# Altium PCB CCjammerRev1.PcbDoc
Units mil, origin at the board's own origin, x right, y up, seen from the top; angles counter-clockwise.
Board outline 3170.31 x 1920.16 mil, 2 copper layers (Top Layer, Bottom Layer); 10 components, 6 nets, 26 pads, 2 vias.
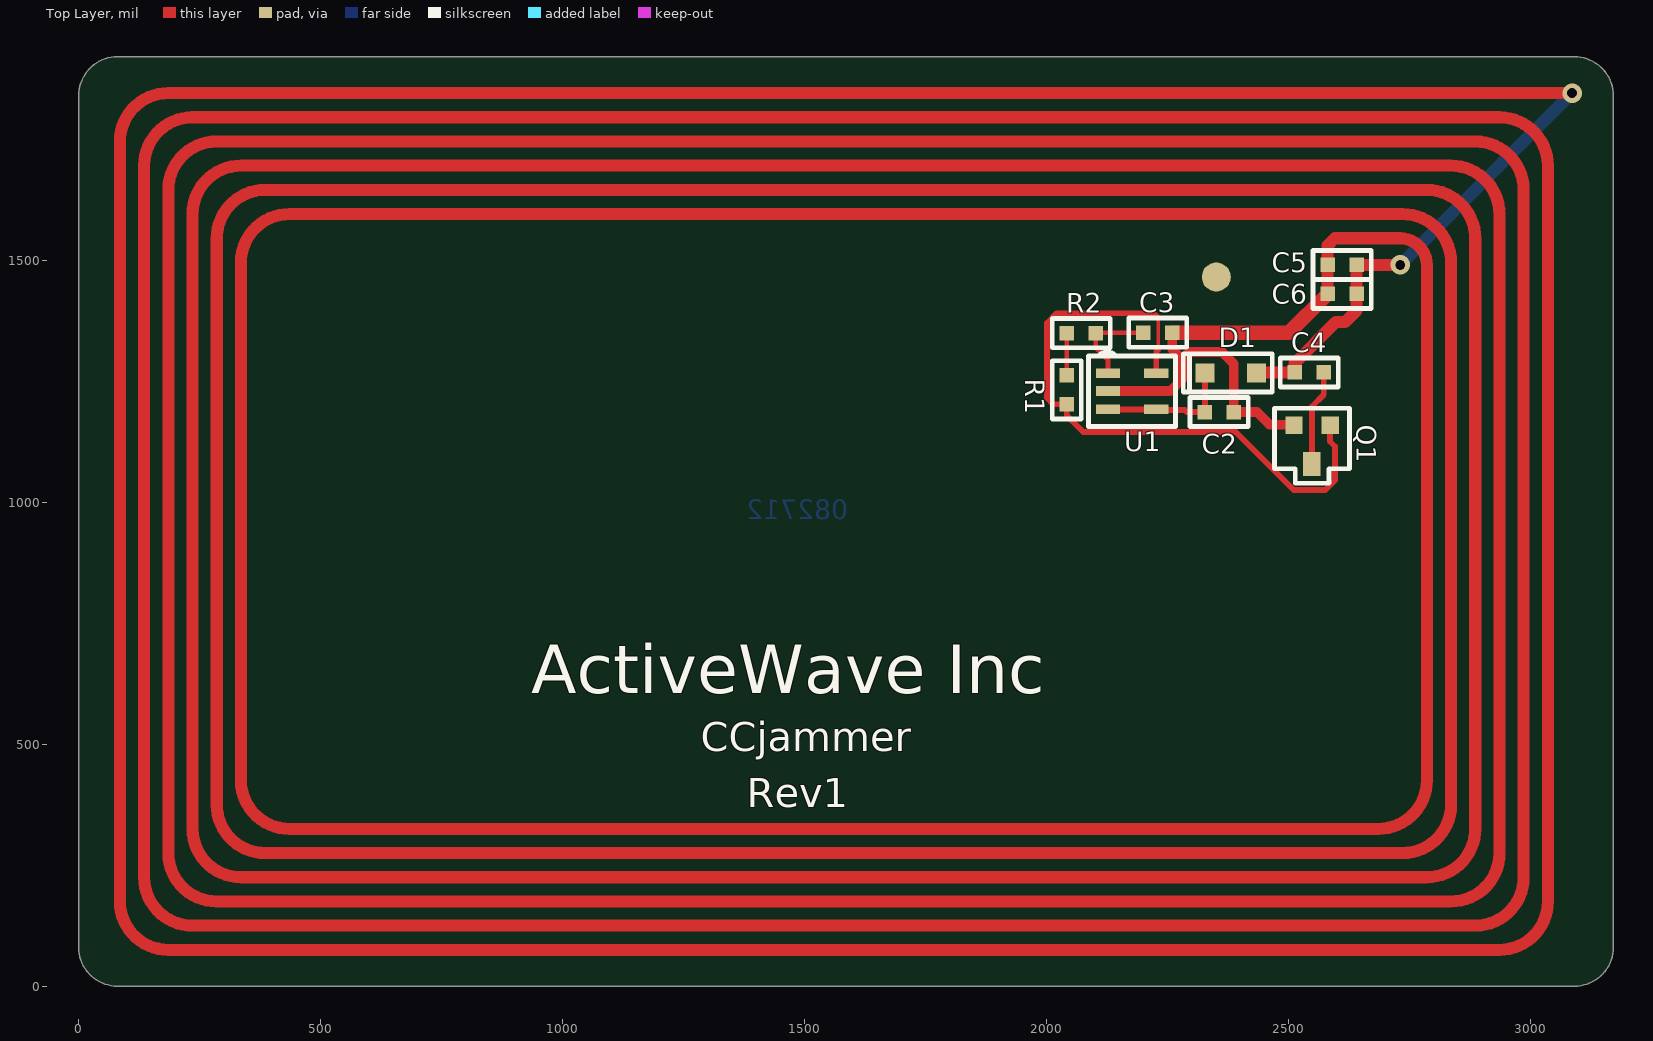
[diagram p0: Top Layer view]
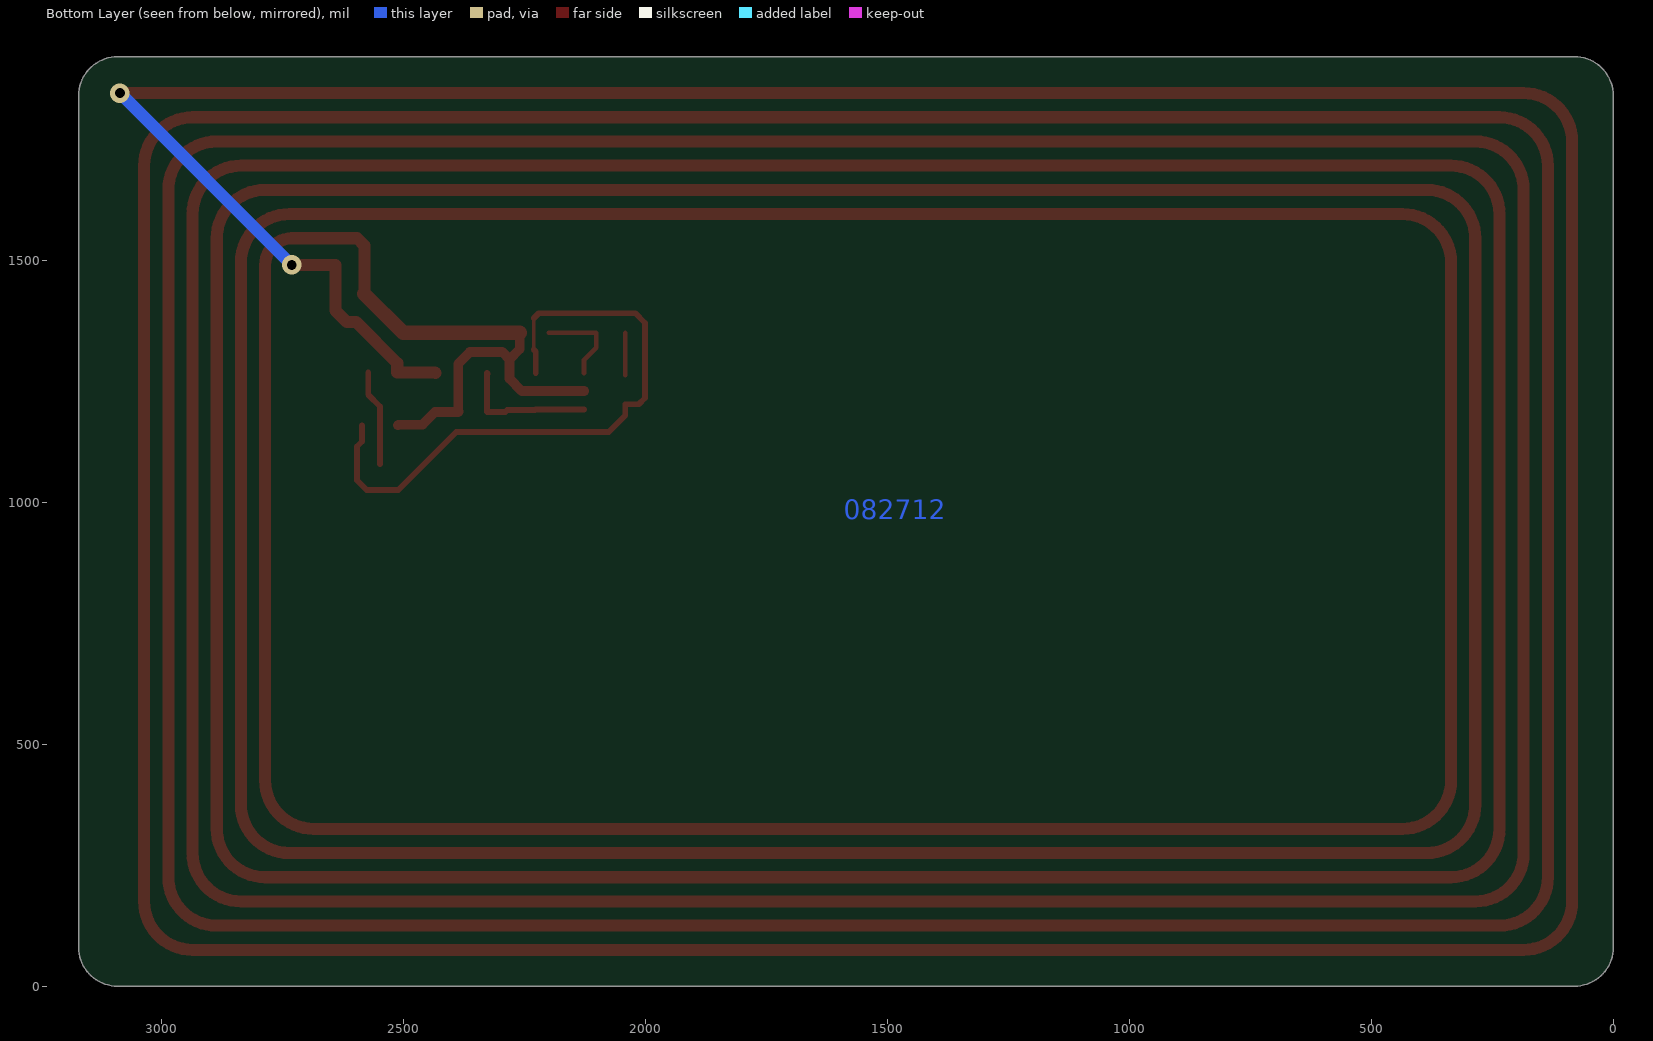
[diagram p1: Bottom Layer view, seen from below]

## Layer stack, top to bottom
Top Layer: signal copper 1.4
Dielectric: core 12.6, FR-4, Dk 4.8
Bottom Layer: signal copper 1.4

## Board outline
-0.16,80.16 ccw(c80,80.16) 80,0 3090,0 ccw(c3090,80.16) 3170.16,80.16 3170,80.16 3170,1839.84 3170.16,1839.84 ccw(c3090,1839.84) 3090,1920 80.16,1920 80.16,1920.16 ccw(c80.16,1840) 0,1840

## Design rules (kind name [scope] priority, off if disabled: settings)
Clearance [All] p1: gap=10
PolygonConnect [All] p1: connectstyle=Relief reliefconductorwidth=10 reliefentries=4 polygonreliefangle="90 Angle"
RoutingVias [All] p1: holewidth=28 width=50 viastyle="Through Hole" minholewidth=28 minwidth=50 maxholewidth=28 maxwidth=50
SilkToSilkClearance [All] p1 off: silktosilkclearance=2
SilkscreenOverComponentPads [All] p1 off: minsilkscreentomaskgap=5
SolderMaskExpansion [All] p1: expansion=4
TestPointUsage FabricationTestPointUsage [All] p1: valid=0 allowmultiple=FALSE
Testpoint FabricationTestpoint [All] p1: side=3 testpointundercomponent=TRUE minsize=40 maxsize=100 preferedsize=60 minholesize=0 maxholesize=40 preferedholesize=32 testpointgrid=1 style=297 order=0123456789
Width [All] p1: maxlimit=100 minlimit=6 preferedwidth=10
22 further rules are at their usual default settings.

## Components (designator, comment, footprint, x,y, rotation, side; value= is the part's Value field where it differs from the comment)
C2 "0.1uf" 0603_072205 2356,1186 r180 top
C3 "0.1uf" 0603_072205 2229,1350 r180 top
C4 "10pf" 0603_072205 2542,1268 r180 top
C5 "10pf" 0603_072205 2610,1490 r0 top
C6 "10pf" 0603_072205 2610,1430 r0 top
D1 "DIODE" SOD323_072005 2380,1267 r0 top
Q1 "VN0605" "SOT23 FET_012005" 2548,1119 r180 top
R1 "1K" 0603_072205 2041,1232 r270 top
R2 "2K" 0603_072205 2071,1349 r180 top
U1 "MIC1557" SOT25_030205 2176,1229 r180 top

## Footprints (in the part's own frame and the unit in brackets; to place one, negate y for a bottom-side part, rotate by r counter-clockwise, add the part's x,y. Pads: shape width x height; smd on the part's side, far side on the other; paste and mask are expansions set on the pad)
0603_072205 [mil] "SM"
  rect 30x30 smd: 1(-30,0) 2(30,0)
  silkscreen extent -60,-30 60,30
SOD323_072005 [mm] "SMT"
  rect 1x1 smd: A(1.35,0) K(-1.35,0)
  silkscreen extent -2.5,-1 2.17,1
"SOT23 FET_012005" [mil] "SMT"
  rect 36x50 smd: D(0.5,40)
  rect 36x36 smd: G(-37.5,-40) S(37.5,-40)
  silkscreen extent -78,-75 78,80
SOT25_030205 [mil] "SMT"
  rect 50x20 smd mask+3: 1(50,-37.5) 2(50,-0.5) 3(50,37.5) 4(-50,37.5) 5(-50,-37.5)
  round 30 on Mech1 paste+0 mask+3: 1(65,-75)
  silkscreen extent -90,-81 90,73

## Part data
C2 C3 C4 C5 C6: library part Cap, "Capacitor"
D1: library part DIODE_DUAL_COM_AN_SOT23
Q1: library part "FET N CHANNEL"
R1 R2: library part RESISTOR
U1: library part MIC1555

## Free pads (board coordinates)
  round 60 smd: 0(2350,1465)

## Via types
v1: diameter 40, hole 20, Top Layer to Bottom Layer, tented both sides, 2 vias

## Nets (pads, with @x,y where several pads share a name; then routed paths per layer and width w, separated by ;. In a path a pad name is that pad's centre, name@x,y a point inside that pad or via, vN(x,y) a via of type N, cw(c..) or ccw(c..) an arc to the next point about the centre after c; other vN are vias at no path point)
ANTENNA: C2.1 C3.1 C4.2 C5.1 C5.2 C6.1 C6.2 D1.A Q1.S U1.2 | length 51881.3
  Top Layer w10: 2254.5,1229.5 2255,1230
  Top Layer w20: U1.2 2254.5,1229.5 ; 2255,1230 2280,1255 2280,1295 ; C3.1 2259,1316 2280,1295 ; C2.1@2385,1187 C2.1 ; Q1.S 2509.5,1160 2460,1160 2434,1186 C2.1 ; C4.2@2510.5,1266.5 C4.2 ; 2280,1295 2295,1310 2362,1310 2386,1286 C2.1
  Top Layer w25: D1.A 2434.15,1268 C4.2 2512,1287 2597.34,1372.34 2615.19,1372.34 ; C6.1 C5.1 2580,1530 2595,1545 2730,1545 cw(c2730,1490) 2785,1490 2785,425 cw(c2685,425) 2685,325 435,325 cw(c435,425) 335,425 335,1495 cw(c435,1495) 435,1595 625,1595 2560,1595 2735,1595 cw(c2735,1495) 2835,1495 2835,375 cw(c2735,375) 2735,275 385,275 cw(c385,375) 285,375 285,1545 cw(c385,1545) 385,1645 2785,1645 cw(c2785,1545) 2885,1545 2885,325 cw(c2785,325) 2785,225 335,225 cw(c335,325) 235,325 235,1595 cw(c335,1595) 335,1695 2835,1695 cw(c2835,1595) 2935,1595 2935,275 cw(c2835,275) 2835,175 285,175 cw(c285,275) 185,275 185,1645 cw(c285,1645) 285,1745 2885,1745 cw(c2885,1645) 2985,1645 2985,225 cw(c2885,225) 2885,125 235,125 cw(c235,225) 135,225 135,1695 cw(c235,1695) 235,1795 2935,1795 cw(c2935,1695) 3035,1695 3035,175 cw(c2935,175) 2935,75 185,75 cw(c185,175) 85,175 85,1745 cw(c185,1745) 185,1845 v1(3085,1845) ; 2615.77,1371.77 2640,1396 C6.2 C5.2 v1(2730,1490)
  Top Layer w30: C3.1 2500,1350 C6.1
  Bottom Layer w25: v1(2730,1490) v1(3085,1845)
GATEDRV: Q1.G R1.2 U1.5 | length 1325.7
  Top Layer w8: 2230,1315 2230,1380
  Top Layer w12: U1.5 2226,1311 2230,1315 ; 2230,1380 2220,1390 2020,1390 2000,1370 2000,1215 2013,1202 R1.2 2041,1179 2075,1145 2390,1145 2510,1025 2575,1025 2595,1045 2595,1115 2585,1125 Q1.G@2585,1158.5
NetC3_2: C3.2 R2.1 U1.1@2126,1266.5 | length 191.3
  Top Layer w10: U1.1@2126,1266.5 2126,1294 2101,1319 R2.1 2102,1350 C3.2
NetC4_1: C4.1 Q1.D | length 199.1
  Top Layer w12: Q1.D 2547.5,1197.5 2572,1222 C4.1
NetR1_1: R1.1 R2.2 | length 87
  Top Layer w10: R1.1 R2.2
VCC: C2.2 D1.K U1.3 U1.4 | length 286.2
  Top Layer w12: U1.3 U1.4 2227.5,1190 2285,1190 2289,1186 C2.2 2326.85,1186.85 D1.K D1.K@2325,1265.15
pads on no net: U1.1@2111,1304

## Other copper
Top Layer:
  text ".Layer_Name" at 1733,-1589 h80
Bottom Layer:
  text "082712" at 1590,965 h40
  text ".Layer_Name" at 2374,-1585 h80

## Silkscreen, mask and mechanical layers (free items; w line width, h text height)
Top Overlay:
  text "ActiveWave Inc" at 935,605 h100
  text "CCjammer" at 1285,485 h60
  text "Rev1" at 1380,370 h60
  text ".Layer_Name" at 1716,-1594 h80
Top Paste:
  text ".Layer_Name" at 1724,-1592 h80
Top Solder:
  text ".Layer_Name" at 1727,-1592 h80
Bottom Solder:
  text ".Layer_Name" at 1720,-1596 h80
Outline:
  lines w10: -0.16,80.16 ccw(c80,80.16) 80,0 3090,0 ccw(c3090,80.16) 3170.16,80.16 ; 0,80.16 0,1840 cw(c80.16,1840) 80.16,1920.16 ; 80.16,1920 3090,1920 cw(c3090,1839.84) 3170.16,1839.84 ; 3170,80.16 3170,1839.84
Title:
  lines w10: -549.99,-1607.94 -549.99,-507.94 cw(c-449.99,-507.94) -449.99,-407.94 3750.01,-407.94 cw(c3750.01,-507.94) 3850.01,-507.94 3850.01,-1607.94 cw(c3750.01,-1607.94) 3750.01,-1707.94 -449.99,-1707.94 ; -549.99,-1606.94 ccw(c-448.99,-1606.94) -450.75,-1707.93 ; -450.86,-1657.93 cw(c-449.99,-1607.94) -499.99,-1607.94 -499.99,-1507.94 cw(c-449.99,-1507.94) -449.99,-1457.94 1225.01,-1457.94 cw(c1225.01,-1507.94) 1275.01,-1507.94 1275.01,-1607.94 ; -450.86,-1407.93 cw(c-449.99,-1357.94) -499.99,-1357.94 -499.99,-1132.94 cw(c-449.99,-1132.94) -449.99,-1082.94 300.01,-1082.94 ; -449.99,-1657.94 1225.01,-1657.94 ; -449.99,-1407.94 300.01,-1407.94 ; 299.3,-1082.97 cw(c301.01,-1131.94) 350.01,-1131.94 ; 300.01,-1032.94 -449.99,-1032.94 cw(c-449.99,-982.94) -499.99,-982.94 -499.99,-757.94 cw(c-449.99,-757.94) -449.99,-707.94 300.01,-707.94 ; 301.01,-1407.94 ccw(c301.01,-1358.94) 350.01,-1358.94 ; 301.01,-707.94 cw(c301.01,-756.94) 350.01,-756.94 ; 302.01,-1032.94 ccw(c302.01,-984.94) 350.01,-984.94 ; 350.01,-1357.94 350.01,-1132.94 ; 350.01,-982.94 350.01,-757.94 ; 400.01,-1358.94 ccw(c449.01,-1358.94) 449.01,-1407.94 ; 400.01,-1357.94 400.01,-1232.94 cw(c450.01,-1232.94) 450.01,-1182.94 2050.01,-1182.94 ; 400.01,-1083.94 ccw(c449.01,-1083.94) 449.01,-1132.94 ; 400.01,-1082.94 400.01,-757.94 cw(c450.01,-757.94) 450.01,-707.94 2500.01,-707.94 cw(c2500.01,-757.94) 2550.01,-757.94 2550.01,-1082.94 cw(c2500.01,-1082.94) 2500.89,-1132.94 ; 450.01,-1407.94 2050.01,-1407.94 ; 450.01,-1132.94 2500.01,-1132.94 ; 1226.18,-1657.94 ccw(c1227.01,-1609.94) 1275,-1608.27 ; 1374.14,-1657.93 cw(c1375.01,-1607.94) 1325.01,-1607.94 1325.01,-1507.94 cw(c1375.01,-1507.94) 1375.01,-1457.94 3050.01,-1457.94 cw(c3050.01,-1507.94) 3100.01,-1507.94 3100.01,-1607.94 ; 1375.01,-1657.94 3050.01,-1657.94 ; 2051.01,-1407.94 ccw(c2051.01,-1358.94) 2100.01,-1358.09 ; 2051.01,-1182.94 cw(c2051.01,-1231.94) 2100.01,-1231.94 ; 2100.01,-1357.94 2100.01,-1232.94 ; 2150.01,-1357.94 2150.01,-1232.94 ; 2150.01,-1356.94 ccw(c2201.01,-1356.94) 2200.12,-1407.93 ; 2150.08,-1233.45 cw(c2198.01,-1230.94) 2198.01,-1182.94 ; 2200.01,-1407.94 2500.01,-1407.94 ccw(c2500.01,-1357.94) 2550.01,-1357.94 2550.01,-1232.94 ; 2200.01,-1182.94 2500.01,-1182.94 ; 2501.01,-1182.94 cw(c2501.01,-1231.94) 2550.01,-1231.94 ; 2600.01,-1358.94 ccw(c2649.01,-1358.94) 2649.87,-1407.93 ; 2600.01,-1357.94 2600.01,-1232.94 cw(c2650.01,-1232.94) 2650.01,-1182.94 3750.01,-1182.94 ; 2650.01,-1407.94 3750.01,-1407.94 ccw(c3750.01,-1357.94) 3800.01,-1357.94 3800.01,-1231.94 ccw(c3751.01,-1231.94) 3751.01,-1182.94 ; 3051.18,-1657.94 ccw(c3052.01,-1609.94) 3100,-1608.27 ; 3150.01,-1608.94 ccw(c3199.01,-1608.94) 3199.87,-1657.93 ; 3150.01,-1607.94 3150.01,-1507.94 cw(c3200.01,-1507.94) 3200.01,-1457.94 3750.01,-1457.94 cw(c3750.01,-1507.94) 3800.02,-1507.07 ; 3200.01,-1657.94 3750.01,-1657.94 ccw(c3750.01,-1607.94) 3800.01,-1607.94 3800.01,-1507.94 ; 3749.3,-457.97 cw(c3751.01,-506.94) 3800.01,-506.94 ; 3750.01,-457.94 2650.01,-457.94 ccw(c2650.01,-507.94) 2600.01,-507.94 2600.01,-1082.94 ccw(c2650.01,-1082.94) 2650.01,-1132.94 3750.01,-1132.94 ccw(c3750.01,-1082.94) 3800.01,-1082.94 3800.01,-507.94 ; -499.99,-607.94 ccw(c-449.99,-607.94) -449.99,-657.94 2500.01,-657.94 ccw(c2500.01,-607.94) 2550.01,-607.94 2550.01,-507.94 ccw(c2500.01,-507.94) 2500.01,-457.94 -449.99,-457.94 ccw(c-449.99,-507.94) -499.99,-507.94 -499.99,-607.94
  text "Active Wave" at 580.01,-602.94 h96
  text "Active Wave" at 2691.09,-618.76 h100
  text "902 Clint Moore Rd." at 2641.09,-723.76 h64
  text "TITLE:" at 437.51,-795.44 h53.33
  text "ENGINEER:" at -449.99,-807.94 h53.33
  text "Suite 126" at 2936.09,-828.76 h64
  text "Boca Raton FL." at 2801.09,-923.76 h64
  text "CCjammer" at 1120,-965 h96
  text "PHONE:" at -449.99,-995.44 h53.33
  text "561-999-9422" at 2856.09,-1043.76 h64
  text "Drawn by:" at -449.99,-1187.94 h53.33
  text "JCMII" at -67.02,-1189 h53.33
  text "PART NO.:" at 450.01,-1270.44 h53.33
  text "REV:" at 2187.51,-1270.44 h53.33
  text "DATE:" at 2650.01,-1270.44 h53.33
  text "8/27/2012" at 3064.79,-1323.4 h53.33
  text "1" at 2362.51,-1345.44 h53.33
  text "PHONE:" at -449.99,-1370.44 h53.33
  text "FILE NAME:" at -449.99,-1547.94 h53.33
  text "LAYER:" at 1390.01,-1547.94 h53.33
  text "GERBER:" at 3210.01,-1547.94 h53.33
Notes:
  lines w25: 4018,-597 4528,-597
  text "NOTES" at 4011,-536 h100
  text "1) MATERIAL IS FR4" at 4018,-780 h100
  text "2) 0.020\" THICK 2 LAYER BOARD" at 4005,-999 h100
  text "3) WHITE SILKSCREEN TOP LAYER" at 4010,-1205 h100
  text "4) GREEN SOLDER MASK BOTH SIDES" at 4005,-1420 h100
Panel:
  text ".Layer_Name" at 1743,-1597 h80
Drill Drawing:
  text ".Layer_Name" at 1722,-1587 h80

## Dimensions
0,80.16 to 3170,80.16 on Dimensions
3090,0 to 3090,1920 on Dimensions